# Altium PCB 2008_SablierElectronique_PCB.PcbDoc (part 2 of 2)
Units mil, origin at the board's own origin, x right, y up, seen from the top; angles counter-clockwise.
Board outline 5246.25 x 5915.54 mil, 2 copper layers (Top Layer, Bottom Layer), stack 62.441 mil thick; 184 components, 217 nets, 656 pads, 372 vias.
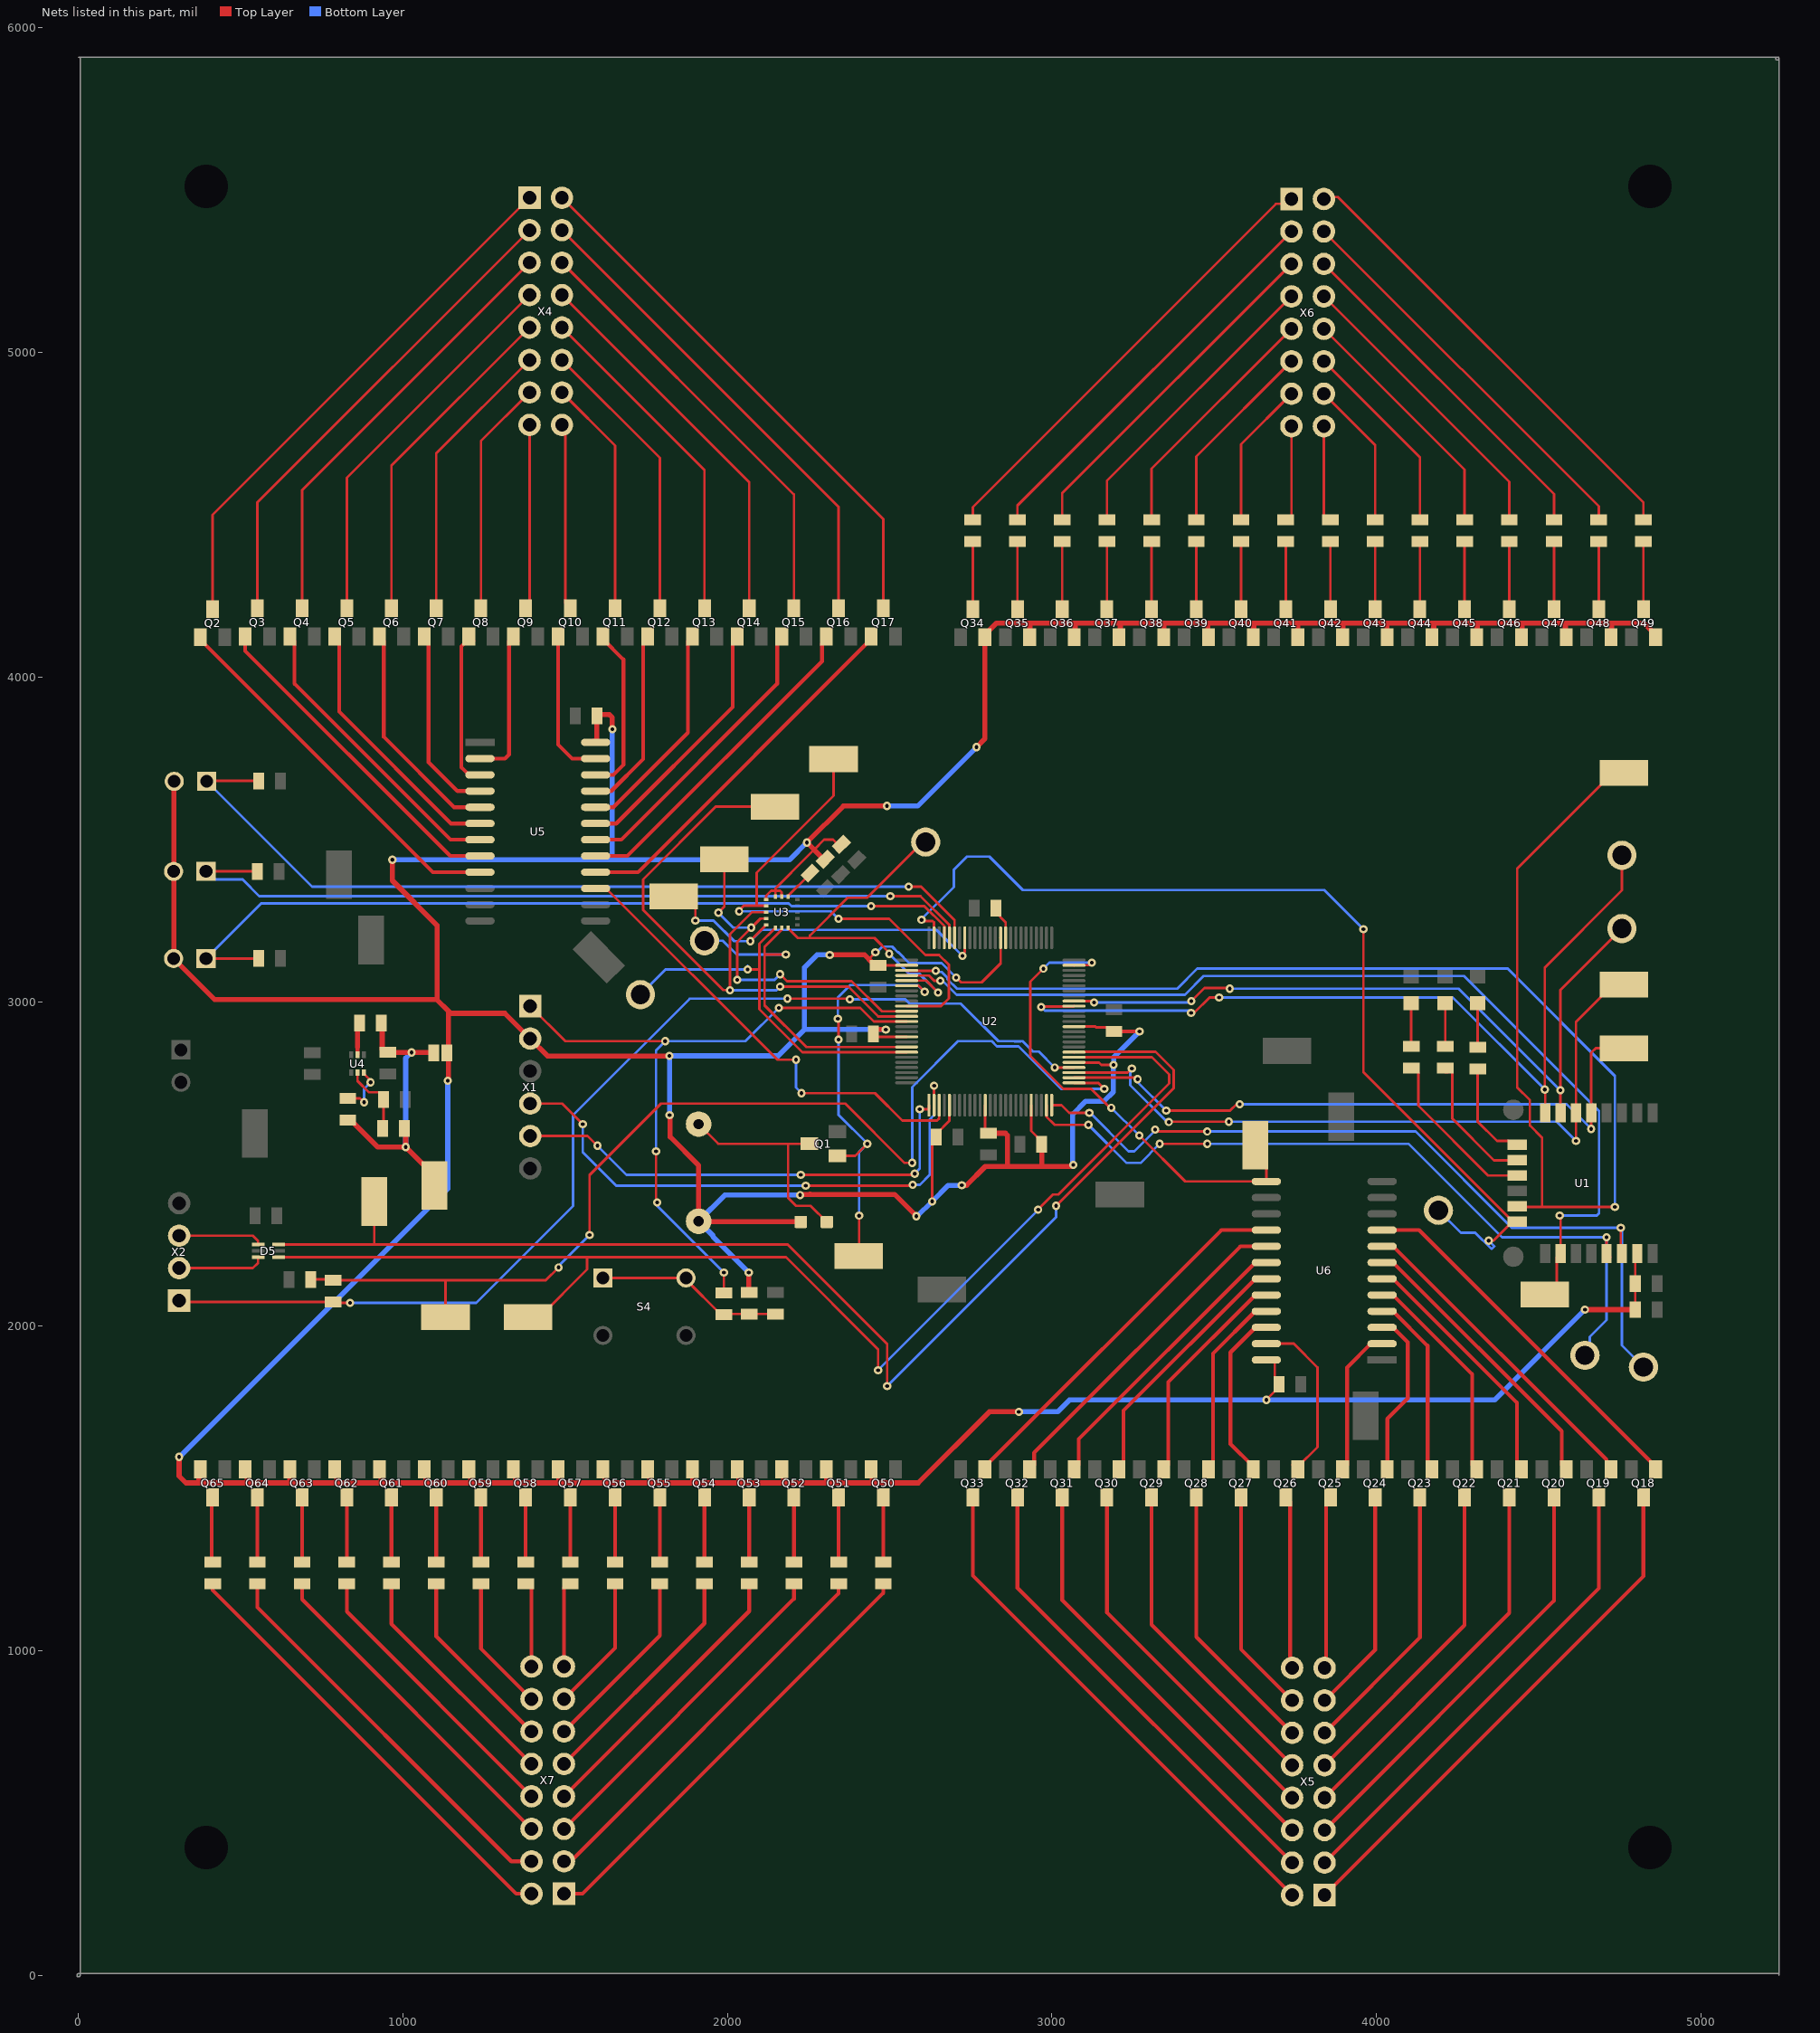
[diagram p2: the nets of this part, all layers, seen from the top]

## Via types
v1: diameter 25.59, hole 11.81, Top Layer to Bottom Layer, tented both sides, 237 vias
v2: diameter 25.59, hole 11.81, Top Layer to Bottom Layer, tented top, 134 vias
v3: diameter 25.59, hole 11.81, Top Layer to Bottom Layer, 1 vias

## Nets (pads, with @x,y where several pads share a name; then routed paths per layer and width w, separated by ;. In a path a pad name is that pad's centre, name@x,y a point inside that pad or via, vN(x,y) a via of type N, cw(c..) or ccw(c..) an arc to the next point about the centre after c; other vN are vias at no path point) (continued)
LB4: TP28.1 U2.74 U6.13 | length 1499.9
  Top Layer w7.87: v1(2973.46,3101.46) 2933.36,3061.36 2933.36,2842.14 2933.42,2842.08 2933.42,2832.99 3035.01,2731.4 3120.91,2731.4 3179.32,2673 v1(3183,2673) ; U2.74@3067.87,3112.05 3068.18,3112.35 3114.75,3112.35 3122.4,3120 v1(3123,3120) ; v1(3269,2587.45) 3410.45,2446 U6.13@3660.73,2446 3660.73,2501.96 3624.71,2537.99 TP28.1@3620.08,2537.99
  Bottom Layer w7.87: v1(2973.46,3101.46) 2992,3120 v1(3123,3120) ; v1(3183,2673) 3266,2590 3266.45,2590 v1(3269,2587.45)
MatriceON: U2.28 U5.15 | length 1449.6
  Top Layer w7.87: U5.15@1593.62,3348.82 1626.18,3348.82 2154,2821 v1(2211,2821) ; v1(2228,2718) 2454.49,2718 2539.18,2633.3 2646.14,2633.3 2652.52,2639.68 U2.28@2652.52,2680.94
  Bottom Layer w7.87: v1(2211,2821) 2211,2735 v1(2228,2718)
NetC1_1: C1.1 U2.85 | length 94.7
  Top Layer w7.87: C1.1@2824.05,3277.66 2857.24,3244.46 U2.85@2857.24,3196.69
NetC3_2: C3.2 U3.14 | length 99.7
  Top Layer w7.87: U3.14@2187.01,3323.88 2187.01,3325.85 2254.34,3393.18 C3.2@2254.34,3395.74
NetC14_2: C14.2 R9.2 R10.1 S4.1 S4.2 | length 576.8
  Top Layer w7.87: S4.1@1616.05,2148.58 S4.2@1866.32,2148.58 ; S4.2@1871.95,2148.58 1871.95,2143.72 1980.14,2035.53 1984.57,2035.53 1986.57,2037.54 C14.2@2148,2037.54
NetC16_2: C16.2 J1.2 L1.1 R11.1 R12.1 TP21.1 | length 970.1
  Top Layer w15.75: R11.1@830,2635.35 838.86,2635.35 922.25,2551.96 v1(1008.48,2551.96) ; L1.1@933.46,2934.23 935.71,2931.98 935.71,2852.32 944.57,2843.46 C16.2@953.43,2843.46 v1(1026.1,2843.46) 1088.81,2843.46 J1.2@1089.99,2842.28 ; R12.1@1003.46,2608.82 1012.32,2599.96 1008.48,2596.12 v1(1008.48,2551.96) ; TP21.1@1096.78,2433.69 1096.78,2463.66 v1(1008.48,2551.96)
  Bottom Layer w15.75: v1(1008.48,2551.96) 1008.48,2825.84 v1(1026.1,2843.46)
NetD1_2: D1.2 R1.2 | length 135.4
  Top Layer w7.87: R1.2@4312,2859.46 D1.2@4312,2994.84
NetD2_2: D2.2 R2.2 | length 132.7
  Top Layer w7.87: R2.2@4212,2862.12 D2.2@4212,2994.84
NetD3_2: D3.2 R3.2 | length 132.7
  Top Layer w7.87: R3.2@4107.18,2862.12 D3.2@4107.18,2994.84
NetD4_A: D4.A LS1.N Q1.3 | length 683
  Top Layer w7.87: LS1.N@1911,2622.61 1971.61,2562 2187.01,2562 ; Q1.3@2252.15,2562 2187.01,2562 ; D4.A@2306.16,2321.04 2305.76,2321.04 2255.81,2371 2211,2371 2187.01,2394.99 2187.01,2562
NetD5_1: D5.1 TP19.1 U2.56 | length 3918.7
  Top Layer w7.87: D5.1@616.69,2212.31 1567.48,2212.31 ; TP19.1@1385.24,2027.5 1420.08,2027.5 1567.48,2174.9 1567.48,2212.31 ; v1(2464,1864) 2464,1928.91 2180.6,2212.31 1567.48,2212.31 ; v1(2957.36,2359) 2957.36,2359.47 3003.4,2405.51 3019.53,2405.51 3361.43,2747.41 3361.43,2775.74 3308.51,2828.66 3067.95,2828.66 U2.56@3067.87,2828.58
  Bottom Layer w7.87: v1(2464,1864) 2957.36,2357.36 v1(2957.36,2359)
NetD5_3: D5.3 TP20.1 U2.57 | length 3936.1
  Top Layer w7.87: D5.3@616.69,2251.68 911.25,2251.68 ; TP20.1@911.25,2384 911.25,2251.68 ; v1(2492,1815.14) 2492,1945 2185.32,2251.68 911.25,2251.68 ; v1(3012.97,2371) 3013.11,2371 3375.21,2733.1 3375.21,2789.63 3319.32,2845.51 3069.66,2845.51 3068.18,2844.03 U2.57@3067.87,2844.33
  Bottom Layer w7.87: v1(2492,1815.14) 3012.97,2336.11 v1(3012.97,2371)
NetD5_4: D5.4 X2.3 | length 261
  Top Layer w7.87: X2.3@310,2278.82 537.23,2278.82 553.31,2262.74 D5.4@553.31,2251.68
NetD5_6: D5.6 X2.2 | length 267.4
  Top Layer w7.87: X2.2@310,2178.82 537.23,2178.82 553.31,2194.89 D5.6@553.31,2212.31
NetL1_2: L1.2 U4.2 | length 89.6
  Top Layer w11.81: U4.2@860,2836.49 860,2860
  Top Layer w15.75: 860,2860 L1.2@860,2926.1
NetQ1_1: Q1.1 TP9.1 U2.6 | length 1308.8
  Top Layer w7.87: Q1.1@2338.76,2524.6 2393.61,2524.6 v1(2431,2561.99) ; v1(2340,2947) 2342,2945 v1(2342,2883) ; TP9.1@2404.73,2216.38 2405.75,2217.4 v1(2405.75,2340.47) ; U2.6@2552.13,3049.05 2552.43,3048.75 2589.25,3048.75 v1(2608,3030)
  Bottom Layer w7.87: v1(2340,2947) 2340,3012.3 2378.85,3051.15 2585.85,3051.15 2607,3030 v1(2608,3030) ; v1(2342,2883) 2342,2650.99 v1(2431,2561.99) 2405.75,2536.75 v1(2405.75,2340.47)
NetQ2_1: Q2.1 U5.9 | length 1165.6
  Top Layer w11.81: Q2.1@375.98,4122.83 375.98,4114.96 1092.13,3398.82 U5.9@1237.09,3398.82
NetQ2_3: Q2.3 X4.1 | length 1672.1
  Top Layer w7.87: Q2.3@413.39,4209.45 413.39,4500.39 X4.1@1390,5477
NetQ3_1: Q3.1 U5.8 | length 1029.6
  Top Layer w11.81: Q3.1@513.78,4125.22 513.78,4080.56 1145.52,3448.82 U5.8@1237.09,3448.82
NetQ3_3: Q3.3 X4.2 | length 1512.6
  Top Layer w7.87: Q3.3@551.18,4211.83 551.18,4538.18 X4.2@1390,5377
NetQ4_1: Q4.1 U5.7 | length 930.1
  Top Layer w11.81: Q4.1@651.57,4117.35 Q4.1@651.57,4125.22 665.35,4111.44 665.35,3979.65 1146.18,3498.82 U5.7@1237.09,3498.82
NetQ4_3: Q4.3 X4.3 | length 1355.5
  Top Layer w7.87: Q4.3@688.98,4211.83 688.98,4575.98 X4.3@1390,5277
NetQ5_1: Q5.1 U5.6 | length 822.1
  Top Layer w11.81: Q5.1@789.37,4117.35 Q5.1@789.37,4125.22 793.31,4121.28 803.15,4111.44 803.15,3893.27 1147.6,3548.82 U5.6@1237.09,3548.82
NetQ5_3: Q5.3 X4.4 | length 1198.5
  Top Layer w7.87: Q5.3@826.77,4211.83 826.77,4613.77 X4.4@1390,5177
NetQ6_1: Q6.1 U5.5 | length 701.5
  Top Layer w11.81: Q6.1@927.17,4125.22 940.95,4111.44 940.95,3815.2 1157.33,3598.82 U5.5@1237.09,3598.82
NetQ6_3: Q6.3 X4.5 | length 1041.4
  Top Layer w7.87: Q6.3@964.57,4211.83 964.57,4651.57 X4.5@1390,5077
NetQ7_1: Q7.1 U5.4 | length 588.4
  Top Layer w11.81: Q7.1@1064.96,4125.22 1078.74,4111.44 1078.74,3737.68 1167.6,3648.82 U5.4@1237.09,3648.82
NetQ7_3: Q7.3 X4.6 | length 884.3
  Top Layer w7.87: Q7.3@1102.36,4211.83 1102.36,4689.36 X4.6@1390,4977
NetQ8_1: Q8.1 U5.3 | length 498.9
  Top Layer w11.81: Q8.1@1216.54,4111.44 1206.69,4121.28 Q8.1@1202.76,4125.22 1202.76,4117.35 1180.04,4094.63 1180.04,3721.79 1203.01,3698.82 U5.3@1237.09,3698.82
NetQ8_3: Q8.3 X4.7 | length 727.2
  Top Layer w7.87: Q8.3@1240.16,4211.83 1240.16,4727.16 X4.7@1390,4877
NetQ9_1: Q9.1 U5.2 | length 484
  Top Layer w11.81: U5.2@1237.09,3748.82 1314.31,3748.82 1326.77,3761.28 1326.77,4111.44 Q9.1@1340.55,4125.22 Q9.1@1354.33,4111.44
NetQ9_3: Q9.3 X4.8 | length 570.2
  Top Layer w7.87: Q9.3@1377.95,4211.83 1390,4223.88 X4.8@1390,4777
NetQ10_1: Q10.1 U5.23 | length 477.9
  Top Layer w11.81: U5.23@1593.62,3748.82 1521.39,3748.82 1478,3792.2 1478,4117 Q10.1@1478.35,4117.35 ; Q10.1@1478.35,4117.35 1482.28,4121.28 Q10.1@1478.35,4125.22 Q10.1@1478.35,4117.35
NetQ10_3: Q10.3 X4.9 | length 575.8
  Top Layer w7.87: X4.9@1490,4777 1500,4767 1500,4227.58 Q10.3@1515.75,4211.83
NetQ11_1: Q11.1 U5.22 | length 520
  Top Layer w11.81: U5.22@1593.62,3698.82 1648.39,3698.82 1679.13,3729.56 1679.13,4054.35 1616.14,4117.35 Q11.1@1616.14,4125.22
NetQ11_3: Q11.3 X4.10 | length 732.9
  Top Layer w7.87: X4.10@1490,4877 1653.54,4713.46 Q11.3@1653.54,4211.83
NetQ12_1: Q12.1 U5.21 | length 570.9
  Top Layer w11.81: U5.21@1593.62,3648.82 1641.63,3648.82 1740.16,3747.34 1740.16,4111.44 Q12.1@1753.94,4125.22
NetQ12_3: Q12.3 X4.11 | length 890
  Top Layer w7.87: X4.11@1490,4977 1791.34,4675.66 Q12.3@1791.34,4211.83
NetQ13_1: Q13.1 U5.20 | length 681.6
  Top Layer w11.81: U5.20@1593.62,3598.82 1647.82,3598.82 1877.95,3828.95 1877.95,4111.44 Q13.1@1891.73,4125.22
NetQ13_3: Q13.3 X4.12 | length 1047.1
  Top Layer w7.87: X4.12@1490,5077 1929.13,4637.87 Q13.3@1929.13,4211.83
NetQ14_1: Q14.1 U5.19 | length 794.1
  Top Layer w11.81: U5.19@1593.62,3548.82 1656.99,3548.82 2015.75,3907.58 2015.75,4111.44 Q14.1@2029.53,4125.22
NetQ14_3: Q14.3 X4.13 | length 1204.1
  Top Layer w7.87: X4.13@1490,5177 2066.93,4600.07 Q14.3@2066.93,4211.83
NetQ15_1: Q15.1 U5.18 | length 910.4
  Top Layer w11.81: U5.18@1593.62,3498.82 1672.76,3498.82 2153.54,3979.6 2153.54,4111.44 Q15.1@2167.32,4125.22
NetQ15_3: Q15.3 X4.14 | length 1361.2
  Top Layer w7.87: X4.14@1490,5277 2204.72,4562.28 Q15.3@2204.72,4211.83
NetQ16_1: Q16.1 U5.17 | length 1028.5
  Top Layer w11.81: U5.17@1593.62,3448.82 1691.63,3448.82 2291.34,4048.52 2291.34,4103.57 2305.12,4117.35 Q16.1@2305.12,4125.22
NetQ16_3: Q16.3 X4.15 | length 1518.3
  Top Layer w7.87: X4.15@1490,5377 2342.52,4524.48 Q16.3@2342.52,4211.83
NetQ17_1: Q17.1 U5.16 | length 1154.8
  Top Layer w11.81: U5.16@1593.62,3398.82 1724.39,3398.82 2442.91,4117.35 Q17.1@2442.91,4125.22
NetQ17_3: Q17.3 X4.16 | length 1675.4
  Top Layer w7.87: X4.16@1490,5477 2480.31,4486.69 Q17.3@2480.31,4211.83
NetQ18_1: Q18.1 U6.9 | length 1152.8
  Top Layer w11.81: U6.9@4017.27,2296 4131.17,2296 4860.24,1566.93 Q18.1@4860.24,1559.06
NetQ18_3: Q18.3 X5.1 | length 1632.4
  Top Layer w11.81: X5.1@3840.16,247.12 4822.84,1229.8 Q18.3@4822.84,1472.44
NetQ19_1: Q19.1 U6.8 | length 999
  Top Layer w11.81: U6.8@4017.27,2246 4051.34,2246 4708.66,1588.68 4708.66,1572.84 Q19.1@4722.44,1559.06
NetQ19_3: Q19.3 X5.2 | length 1475.3
  Top Layer w11.81: X5.2@3840.16,347.12 4685.04,1192.01 Q19.3@4685.04,1472.44
NetQ20_1: Q20.1 U6.7 | length 891.9
  Top Layer w11.81: U6.7@4017.27,2196 4051.34,2196 4570.87,1676.48 4570.87,1572.84 Q20.1@4584.65,1559.06
NetQ20_3: Q20.3 X5.3 | length 1318.2
  Top Layer w11.81: X5.3@3840.16,447.12 4547.24,1154.21 Q20.3@4547.24,1472.44
NetQ21_1: Q21.1 U6.6 | length 784.8
  Top Layer w11.81: U6.6@4017.27,2146 4051.34,2146 4433.07,1764.27 4433.07,1572.84 Q21.1@4446.85,1559.06
NetQ21_3: Q21.3 X5.4 | length 1161.1
  Top Layer w11.81: X5.4@3840.16,547.12 4409.45,1116.42 Q21.3@4409.45,1472.44
NetQ22_1: Q22.1 U6.5 | length 677.8
  Top Layer w11.81: U6.5@4017.27,2096 4051.34,2096 4295.28,1852.07 4295.28,1572.84 Q22.1@4309.06,1559.06
NetQ22_3: Q22.3 X5.5 | length 1004.1
  Top Layer w11.81: X5.5@3840.16,647.12 4271.65,1078.62 Q22.3@4271.65,1472.44
NetQ23_1: Q23.1 U6.4 | length 570.7
  Top Layer w11.81: U6.4@4017.27,2046 4051.34,2046 4157.48,1939.86 4157.48,1572.84 Q23.1@4171.26,1559.06
NetQ23_3: Q23.3 X5.6 | length 847
  Top Layer w11.81: X5.6@3840.16,747.12 4133.86,1040.82 Q23.3@4133.86,1472.44
NetQ24_1: Q24.1 U6.3 | length 515.8
  Top Layer w11.81: U6.3@4017.27,1996 4051.34,1996 4096.46,1950.88 4096.46,1777.46 4033.46,1714.46 Q24.1@4033.46,1559.06
NetQ24_3: Q24.3 X5.7 | length 689.9
  Top Layer w11.81: X5.7@3840.16,847.12 3996.06,1003.03 Q24.3@3996.06,1472.44
NetQ25_1: Q25.1 U6.2 | length 457.3
  Top Layer w11.81: Q25.1@3895.67,1559.06 3909.45,1572.84 3909.45,1872.26 3983.19,1946 U6.2@4017.27,1946
NetQ25_3: Q25.3 X5.8 | length 532.8
  Top Layer w11.81: X5.8@3840.16,947.12 3844.49,951.45 3844.49,1458.66 Q25.3@3858.27,1472.44
NetQ26_1: Q26.1 U6.23 | length 545.8
  Top Layer w7.87: U6.23@3660.73,1946 3745,1946 3818,1873 3818,1627.06 3757.87,1566.93 Q26.1@3757.87,1559.06
  Top Layer w11.81: Q26.1@3744.09,1572.84 Q26.1@3757.87,1559.06
NetQ26_3: Q26.3 X5.9 | length 533.5
  Top Layer w11.81: Q26.3@3720.47,1472.44 3734.25,1458.66 3734.25,953.03 X5.9@3740.16,947.12
NetQ27_1: Q27.1 U6.22 | length 531.8
  Top Layer w11.81: Q27.1@3620.08,1559.06 3620.08,1566.93 3550,1637.01 3550,1919.34 3626.66,1996 U6.22@3660.73,1996
NetQ27_3: Q27.3 X5.10 | length 690.5
  Top Layer w11.81: Q27.3@3582.68,1472.44 3582.68,1004.6 X5.10@3740.16,847.12
NetQ28_1: Q28.1 U6.21 | length 580.8
  Top Layer w11.81: Q28.1@3482.28,1559.06 3496.06,1572.84 3496.06,1915.41 3626.66,2046 U6.21@3660.73,2046
NetQ28_3: Q28.3 X5.11 | length 847.6
  Top Layer w11.81: Q28.3@3444.88,1472.44 3444.88,1042.4 X5.11@3740.16,747.12
NetQ29_1: Q29.1 U6.20 | length 687.9
  Top Layer w11.81: Q29.1@3344.49,1559.06 3358.27,1572.84 3358.27,1827.61 3626.66,2096 U6.20@3660.73,2096
NetQ29_3: Q29.3 X5.12 | length 1004.7
  Top Layer w11.81: Q29.3@3307.09,1472.44 3307.09,1080.19 X5.12@3740.16,647.12
NetQ30_1: Q30.1 U6.19 | length 795
  Top Layer w11.81: Q30.1@3206.69,1559.06 3220.47,1572.84 3220.47,1739.82 3626.66,2146 U6.19@3660.73,2146
NetQ30_3: Q30.3 X5.13 | length 1161.8
  Top Layer w11.81: Q30.3@3169.29,1472.44 3169.29,1117.99 X5.13@3740.16,547.12
NetQ31_1: Q31.1 U6.18 | length 902
  Top Layer w11.81: Q31.1@3068.9,1559.06 3082.68,1572.84 3082.68,1652.02 3626.66,2196 U6.18@3660.73,2196
NetQ31_3: Q31.3 X5.14 | length 1318.9
  Top Layer w11.81: Q31.3@3031.5,1472.44 3031.5,1155.78 X5.14@3740.16,447.12
NetQ32_1: Q32.1 U6.17 | length 1035.9
  Top Layer w11.81: Q32.1@2931.1,1559.06 2944.88,1572.84 2944.88,1609.88 3581,2246 U6.17@3660.73,2246
NetQ32_3: Q32.3 X5.15 | length 1475.9
  Top Layer w11.81: Q32.3@2893.7,1472.44 2893.7,1193.58 X5.15@3740.16,347.12
NetQ33_1: Q33.1 U6.16 | length 1177.3
  Top Layer w11.81: Q33.1@2793.31,1559.06 2793.31,1566.93 3522.38,2296 U6.16@3660.73,2296
NetQ33_3: Q33.3 X5.16 | length 1633
  Top Layer w11.81: Q33.3@2755.91,1472.44 2755.91,1231.37 X5.16@3740.16,247.12
NetQ34_3: Q34.3 R14.2 | length 208.7
  Top Layer w7.87: Q34.3@2755.9,4209.45 R14.2@2755.91,4418.11
NetQ35_3: Q35.3 R15.2 | length 208.7
  Top Layer w7.87: Q35.3@2893.7,4209.45 R15.2@2893.7,4418.11
NetQ36_3: Q36.3 R16.2 | length 208.7
  Top Layer w7.87: Q36.3@3031.5,4209.45 R16.2@3031.5,4418.11
NetQ37_3: Q37.3 R17.2 | length 208.7
  Top Layer w7.87: Q37.3@3169.29,4209.45 R17.2@3169.29,4418.11
NetQ38_3: Q38.3 R18.2 | length 208.7
  Top Layer w7.87: Q38.3@3307.09,4209.45 R18.2@3307.09,4418.11
NetQ39_3: Q39.3 R19.2 | length 208.7
  Top Layer w7.87: Q39.3@3444.88,4209.45 R19.2@3444.88,4418.11
NetQ40_3: Q40.3 R20.2 | length 208.7
  Top Layer w7.87: Q40.3@3582.68,4209.45 R20.2@3582.68,4418.11
NetQ41_3: Q41.3 R21.2 | length 208.7
  Top Layer w7.87: Q41.3@3720.47,4209.45 R21.2@3720.47,4418.11
NetQ42_3: Q42.3 R22.2 | length 208.7
  Top Layer w7.87: Q42.3@3858.27,4209.45 R22.2@3858.27,4418.11
NetQ43_3: Q43.3 R23.2 | length 208.7
  Top Layer w7.87: Q43.3@3996.06,4209.45 R23.2@3996.06,4418.11
NetQ44_3: Q44.3 R24.2 | length 208.7
  Top Layer w7.87: Q44.3@4133.86,4209.45 R24.2@4133.86,4418.11
NetQ45_3: Q45.3 R25.2 | length 208.7
  Top Layer w7.87: Q45.3@4271.65,4209.45 R25.2@4271.65,4418.11
NetQ46_3: Q46.3 R26.2 | length 208.7
  Top Layer w7.87: Q46.3@4409.45,4209.45 R26.2@4409.45,4418.11
NetQ47_3: Q47.3 R27.2 | length 208.7
  Top Layer w7.87: Q47.3@4547.24,4209.45 R27.2@4547.24,4418.11
NetQ48_3: Q48.3 R28.2 | length 208.7
  Top Layer w7.87: Q48.3@4685.04,4209.45 R28.2@4685.04,4418.11
NetQ49_3: Q49.3 R29.2 | length 208.7
  Top Layer w7.87: Q49.3@4822.83,4209.45 R29.2@4822.84,4418.11
NetQ50_3: Q50.3 R30.2 | length 198.8
  Top Layer w11.81: R30.2@2480.32,1273.62 Q50.3@2480.32,1472.44
NetQ51_3: Q51.3 R31.2 | length 198.8
  Top Layer w11.81: R31.2@2342.52,1273.62 Q51.3@2342.52,1472.44
NetQ52_3: Q52.3 R32.2 | length 198.8
  Top Layer w11.81: R32.2@2204.72,1273.62 Q52.3@2204.72,1472.44
NetQ53_3: Q53.3 R33.2 | length 198.8
  Top Layer w11.81: R33.2@2066.93,1273.62 Q53.3@2066.93,1472.44
NetQ54_3: Q54.3 R34.2 | length 198.8
  Top Layer w11.81: R34.2@1929.13,1273.62 Q54.3@1929.13,1472.44
NetQ55_3: Q55.3 R35.2 | length 198.8
  Top Layer w11.81: R35.2@1791.34,1273.62 Q55.3@1791.34,1472.44
NetQ56_3: Q56.3 R36.2 | length 198.8
  Top Layer w11.81: R36.2@1653.54,1273.62 Q56.3@1653.54,1472.44
NetQ57_3: Q57.3 R37.2 | length 198.8
  Top Layer w11.81: R37.2@1515.75,1273.62 Q57.3@1515.75,1472.44
NetQ58_3: Q58.3 R38.2 | length 198.8
  Top Layer w11.81: R38.2@1377.95,1273.62 Q58.3@1377.95,1472.44
NetQ59_3: Q59.3 R39.2 | length 198.8
  Top Layer w11.81: R39.2@1240.16,1273.62 Q59.3@1240.16,1472.44
NetQ60_3: Q60.3 R40.2 | length 198.8
  Top Layer w11.81: R40.2@1102.36,1273.62 Q60.3@1102.36,1472.44
NetQ61_3: Q61.3 R41.2 | length 198.8
  Top Layer w11.81: R41.2@964.57,1273.62 Q61.3@964.57,1472.44
NetQ62_3: Q62.3 R42.2 | length 198.8
  Top Layer w11.81: R42.2@826.77,1273.62 Q62.3@826.77,1472.44
NetQ63_3: Q63.3 R43.2 | length 198.8
  Top Layer w11.81: R43.2@688.98,1273.62 Q63.3@688.98,1472.44
NetQ64_3: Q64.3 R44.2 | length 198.8
  Top Layer w11.81: R44.2@551.18,1273.62 Q64.3@551.18,1472.44
NetQ65_3: Q65.3 R45.2 | length 201.5
  Top Layer w11.81: R45.2@413.39,1273.62 410.17,1276.84 410.17,1460 413.39,1463.22 Q65.3@413.39,1472.44
NetR1_1: R1.1 U1.10 | length 313.7
  Top Layer w7.87: R1.1@4312,2792.54 4312,2630.24 4371.85,2570.39 4408.09,2570.39 4419.9,2558.58 U1.10@4433.68,2558.58
NetR2_1: R2.1 U1.11 | length 431.7
  Top Layer w7.87: R2.1@4212,2782.72 R2.1@4220.86,2782.72 ; R2.1@4212,2795.19 4220.86,2795.19 4233.65,2782.4 4233.65,2639.73 4362.06,2511.33 U1.11@4433.68,2511.33
NetR3_1: R3.1 U1.12 | length 524.1
  Top Layer w7.87: R3.1@4107.18,2795.19 4116.04,2795.19 4128.84,2782.4 4128.84,2679.16 4343.91,2464.09 U1.12@4433.68,2464.09
NetR4_1: R4.1 R5.1 TP18.1 U2.51 | length 3428.6
  Top Layer w7.87: R5.1@715.46,2144 782.46,2144 R4.1@785,2141.46 1127.95,2141.46 ; TP18.1@1131,2027.5 1131,2138.42 1127.95,2141.46 ; v1(1479.22,2180.93) 1439.75,2141.46 1127.95,2141.46 ; v1(1574.8,2281) 1574.8,2465.62 1795.18,2686 2362.74,2686 2545.74,2503 v1(2569,2503) ; U2.51@3067.57,2750.14 U2.51@3067.87,2749.84 3068.18,2749.54 3142.88,2749.54 3161.02,2731.4 v1(3161.19,2731.4)
  Bottom Layer w7.87: v1(1479.22,2180.93) 1479.22,2185.41 v1(1574.8,2281) ; v1(2569,2503) 2569,2737 2710,2878 2814.35,2878 2830.34,2862.01 2897.01,2862.01 3027.62,2731.4 v1(3161.19,2731.4)
NetR6_1: R6.1 S2.1 U2.96 | length 2543
  Top Layer w7.87: S2.1@400,3398.82 402.5,3401.32 R6.1@551.18,3401.32 ; v1(2502,3325) 2595.01,3325 2683.72,3236.29 2683.72,3196.99 U2.96@2684.02,3196.69
  Bottom Layer w7.87: S2.1@400,3398.82 422.64,3376.18 505.82,3376.18 557,3325 v1(2502,3325)
NetR7_1: R7.1 S3.1 U2.97 | length 2572.7
  Top Layer w7.87: S3.1@393,3132.82 R7.1@555.12,3132.82 ; v1(2442.78,3294.13) 2606.39,3294.13 2667.97,3232.55 2667.97,3196.99 U2.97@2668.27,3196.69
  Bottom Layer w7.87: S3.1@393,3132.82 563.12,3302.94 2188.23,3302.94 2197.04,3294.13 v1(2442.78,3294.13)
NetR8_1: R8.1 S1.1 U2.95 | length 2696.8
  Top Layer w7.87: S1.1@395,3678.82 396.18,3680 R8.1@555.12,3680 ; v1(2558,3354) 2596.66,3354 2699.76,3250.89 U2.95@2699.76,3196.69
  Bottom Layer w7.87: S1.1@395,3678.82 719.82,3354 v1(2558,3354)
NetR10_2: R10.2 U2.13 X1.1 | length 2138.7
  Top Layer w7.87: X1.1@1392,2986 1500,2878 v1(1808,2878) ; v1(1780,2539) 1780,2384 v1(1783,2381) ; R10.2@1989,2102.46 v1(1989,2165) ; v1(2158,2981) 2409,2981 2451.18,2938.82 U2.13@2552.13,2938.82
  Bottom Layer w7.87: v1(1780,2539) 1780,2850 v1(1808,2878) 2055,2878 v1(2158,2981) ; v1(1783,2381) 1783,2371 v1(1989,2165)
NetR11_2: R11.2 U4.6 | length 163
  Top Layer w7.87: R11.2@830,2702.28 867.4,2702.28 879.68,2690 v1(880,2690) ; U4.6@879.68,2781.26 879.68,2777.26 894.96,2761.98 894.96,2761.33 900,2756.29 v1(900,2751.49)
  Bottom Layer w7.87: v1(880,2690) 880,2731.49 v1(900,2751.49)
NetR12_2: R12.2 R13.1 U4.5 | length 225.9
  Top Layer w7.87: U4.5@860,2781.26 860,2755.43 894.96,2720.47 927.2,2720.47 940,2707.68 R13.1@940,2698.82 940,2612.28 R12.2@936.54,2608.82
NetTP1_1: TP1.1 U2.10 U3.2 | length 1616.4
  Top Layer w7.87: v1(2036,3278) 2036,3281 2050.34,3295.34 2089.72,3295.34 ; U3.2@2119.09,3295.34 2089.72,3295.34 ; TP1.1@2338.17,3735.96 TP1.1@2326.78,3747.34 2326.78,3634.77 2089.72,3397.71 2089.72,3295.34 ; v1(2342.52,3255.48) 2498.63,3255.48 2610.22,3143.89 2652.18,3143.89 2682.36,3113.7 2682.36,3010.36 2658.06,2986.06 U2.10@2552.13,2986.06
  Bottom Layer w7.87: v1(2036,3278) 2319.04,3278 2341.57,3255.48 v1(2342.52,3255.48)
NetTP2_1: TP2.1 U2.12 U3.3 | length 1861.5
  Top Layer w7.87: v1(2008.07,3035.19) v1@2007.46,3035.8 ; U3.3@2119.09,3275.66 2075.66,3275.66 2007.46,3207.46 v1@2007.46,3035.8 ; TP2.1@2146.42,3600.48 1963.92,3600.48 1740.16,3376.72 1740.16,3282.54 1986.9,3035.8 v1@2007.46,3035.8 ; v1(2162.06,3046.09) 2372.91,3046.09 2464.43,2954.57 U2.12@2552.13,2954.57
  Bottom Layer w7.87: v1(2008.07,3035.19) 2151.15,3035.19 v1(2162.06,3046.09)
NetTP3_1: TP3.1 U2.11 U3.4 | length 1104.5
  Top Layer w7.87: v1(1971.93,3274) 1990.45,3292.52 TP3.1@1990.45,3438.66 ; v1(2030.1,3067.3) 2030.1,3184.35 2101.72,3255.97 U3.4@2119.09,3255.97 ; v1(2162.06,3084.36) 2183.26,3063.16 2382.84,3063.16 2475.69,2970.31 U2.11@2552.13,2970.31
  Bottom Layer w7.87: v1(1971.93,3274) 2017.93,3228 v1(2073,3228) ; v1(2030.1,3067.3) 2144.99,3067.3 v1(2162.06,3084.36)
NetTP4_1: TP4.1 U2.93 U3.5 | length 1072.7
  Top Layer w7.87: v1@1900,3250 v1(1901,3250) 1901,3294 TP4.1@1902,3295 ; v1(2070.41,3186.03) 2070.41,3187.6 U3.5@2119.09,3236.29 ; v1(2724,3141) 2724,3145.79 2730.96,3152.75 2730.96,3196.39 U2.93@2731.26,3196.69
  Bottom Layer w7.87: v1(1901,3250) 1957,3250 2020.97,3186.03 v1(2070.41,3186.03) 2105.38,3221 2644,3221 v1(2724,3141)
NetTP5_1: TP5.1 U1.6 U2.53 | length 2244.8
  Top Layer w7.87: U2.53@3067.87,2781.34 3233.34,2781.34 v1(3246,2794) ; v1(3360.19,2628.97) 3361.43,2630.2 v1(3545,2630.2) ; v1(4615,2571) 4615,2656.78 U1.6@4614.78,2657 4614.78,2937.13 4730.52,3052.87 TP5.1@4763.04,3052.87
  Bottom Layer w7.87: v1(3246,2794) 3241.36,2789.36 3241.36,2742.62 3355.02,2628.97 v1(3360.19,2628.97) ; v1(3545,2630.2) 4555.8,2630.2 v1(4615,2571)
NetTP6_1: TP6.1 U1.5 U2.52 | length 2038.1
  Top Layer w7.87: U2.52@3067.87,2765.59 3068.08,2765.8 3259.2,2765.8 v1(3264,2761) ; v1(3352,2664) 3548.66,2664 3571.36,2686.7 3578.69,2679.37 v1(3578.69,2683.84) v1@3578.98,2683.84 ; v1(4662,2608) 4662,2842.18 4676.13,2856.31 TP6.1@4763.04,2856.31 TP6.1@4769.8,2856.31
  Bottom Layer w7.87: v1(3264,2761) 3264,2752 v1(3352,2664) ; v1(3578.69,2683.84) 4586.16,2683.84 v1(4662,2608)
NetTP7_1: TP7.1 U1.14 U2.3 | length 4605.1
  Top Layer w7.87: U2.3@2552.13,3096.3 2553.31,3095.12 2641.88,3095.12 v1(2642,3095) ; U1.14@4433.68,2369.6 4435.08,2371 4439.08,2367 4510.26,2367 ; v1(4735,2367) 4510.26,2367 ; TP7.1@4763.04,3704.7 4728.19,3704.7 4433.68,3410.19 4433.68,2735.32 4473,2696 4473,2618 4510.26,2580.74 4510.26,2367
  Bottom Layer w7.87: v1(2642,3095) 2645.39,3091.61 2660.04,3091.61 2678.27,3073.38 2678.27,3068.72 2706.99,3040 3386.19,3040 3447.65,3101.46 4404.54,3101.46 4735,2771 v1(4735,2367)
NetTP8_1: TP8.1 U1.18 U2.4 | length 3059
  Top Layer w7.87: U2.4@2552.13,3080.55 2552.43,3080.25 2620.75,3080.25 2637,3064 v1(2655.63,3064) ; TP8.1@4519,2097.35 4519.7,2097.35 4555.72,2133.38 4555.72,2212.12 U1.18@4567.54,2223.93 4567.54,2338.46 v1(4565,2341)
  Bottom Layer w7.87: v1(2655.63,3064) 2663.26,3064 2706.26,3021 3409.5,3021 3467.5,3079 4270,3079 4686,2663 4686,2348 4679,2341 v1(4565,2341)
NetTP10_1: TP10.1 U1.7 U2.67 | length 2297.1
  Top Layer w7.87: U2.67@3067.87,3001.81 3068.18,3001.51 3125.49,3001.51 v1(3130,2997) ; v1(3429.81,3001.81) 3470,3042 3546,3042 v1(3548,3040) ; U1.7@4567.54,2657 4567,2657.54 v1(4567,2727) 4567,3035.64 TP10.1@4756.51,3225.15
  Bottom Layer w7.87: v1(3130,2997) 3425,2997 v1(3429.81,3001.81) ; v1(3548,3040) 4253,3040 4564,2729 4565,2729 v1(4567,2727)
NetTP11_1: TP11.1 U1.8 U2.66 | length 2693.2
  Top Layer w7.87: v1(2966.41,2983.41) 2967.88,2984.88 3066.69,2984.88 U2.66@3067.87,2986.06 ; v1(3429,2965) 3438,2965 3486,3013 v1(3515,3013) ; U1.8@4520.29,2657 4520.29,2727.71 v1(4519,2729) 4519,3105.35 4756.51,3342.86 TP11.1@4756.51,3451
  Bottom Layer w7.87: v1(2966.41,2983.41) 2977.82,2972 3422,2972 v1(3429,2965) ; v1(3515,3013) 4235,3013 v1(4519,2729)
NetTP12_1: TP12.1 U1.15 U2.99 | length 3105.4
  Top Layer w7.87: v1(2598,3252) 2601.39,3248.61 2632.42,3248.61 2636.47,3244.56 2636.47,3196.99 U2.99@2636.77,3196.69 ; v1(3960,3223) 3960,2782.25 U1.15@4419.9,2322.36 ; v1(4346,2263.4) 4360.94,2263.4 U1.15@4419.9,2322.36 ; U1.15@4426.79,2322.36 U1.15@4419.9,2322.36
  Bottom Layer w7.87: v1(2598,3252) 2596,3252 2697.26,3353.26 2697.26,3406.26 2738,3447 2807,3447 2910.36,3343.64 3839.36,3343.64 v1(3960,3223) ; TP12.1@4191,2356.96 4259.96,2288 4304,2288 4353.21,2238.79 4356.19,2238.79 4363.4,2246 v1(4346,2263.4)
NetTP13_1: TP13.1 U1.22 U2.50 | length 2520.6
  Top Layer w7.87: U2.50@2998.98,2680.94 3029.06,2680.94 3053,2657 v1(3114.99,2657) ; v1(3318,2606) 3324.33,2599.67 v1(3478.67,2599.67) ; v1(4753,2303) 4753,2227.44 U1.22@4756.51,2223.93
  Bottom Layer w7.87: v1(3114.99,2657) 3117.98,2657 3236.04,2538.94 3253.96,2538.94 3318,2602.98 v1(3318,2606) ; v1(3478.67,2599.67) 4120.33,2599.67 4417,2303 v1(4753,2303) 4756.39,2299.61 4756.39,1940.45 TP13.1@4822.84,1874.01 ; TP13.1@4826.23,1884.1 TP13.1@4836.32,1874.01
NetTP14_1: TP14.1 U1.21 U2.49 | length 2422.3
  Top Layer w7.87: U2.49@2983.23,2680.94 2983.53,2680.64 2983.53,2645.08 3008.26,2620.35 v1(3112.38,2620.35) ; v1(3332,2561.99) v1(3478.68,2562) ; v1(4709.27,2274) U1.21@4709.27,2223.93 U1.21@4721,2212.2
  Bottom Layer w7.87: v1(3112.38,2620.35) 3229.73,2503 3273.01,2503 v1(3332,2561.99) ; v1(3478.68,2562) 4099,2562 4387,2274 v1(4709.27,2274) 4709.27,2019.27 4657.12,1967.12 4657.12,1924.87 TP14.1@4642.56,1910.31
NetTP15_1: TP15.1 U2.5 U3.8 | length 1111.3
  Top Layer w7.87: U3.8@2187.01,3227.43 2187.01,3225.46 2216.47,3196 2253.94,3196 ; v1(2498,3147) 2498,3151 2453,3196 2253.94,3196 ; U2.5@2552.13,3064.8 2612.2,3064.8 v1(2649,3028) ; TP15.1@2584.91,3474.69 2430.35,3320.13 2370.02,3320.13 2253.94,3204.06 2253.94,3196
  Bottom Layer w7.87: v1(2498,3147) 2559.19,3085.8 2591.19,3085.8 v1(2649,3028)
NetTP16_1: TP16.1 U2.18 U3.7 | length 1085.4
  Top Layer w7.87: U3.7@2167.32,3227.43 2167.32,3221.38 2114.54,3168.6 2114.54,3146.08 ; v1(2179.67,3145.16) 2115.46,3145.16 2114.54,3146.08 ; U2.18@2552.13,2860.08 2242.92,2860.08 2114.54,2988.46 2114.54,3146.08
  Bottom Layer w7.87: TP16.1@1929,3187.6 1985.81,3187.6 2028.26,3145.16 v1(2179.67,3145.16)
NetTP17_1: TP17.1 U2.19 U3.6 | length 1189.6
  Top Layer w7.87: v1(2062,3099) 2098.43,3099 ; U3.6@2147.64,3227.43 2098.43,3178.22 2098.43,3099 ; U2.19@2552.13,2844.33 2230.67,2844.33 2098.43,2976.57 2098.43,3099
  Bottom Layer w7.87: TP17.1@1731.61,3021.7 1808.91,3099 v1(2062,3099) 2062,3109.87 v1@2061.87,3110
NetU2_26: U2.26 X1.5 | length 1483.4
  Top Layer w7.87: X1.5@1392,2586 1569,2586 v1(1599,2556) ; v1(2225.84,2466) 2573,2466 v1(2577,2470) ; v1@2592.61,2666.4 v1(2592.61,2668.05) 2620.3,2668.05 2621.02,2668.78 U2.26@2621.02,2680.94
  Bottom Layer w7.87: v1(1599,2556) 1689,2466 v1(2225.84,2466) ; v1(2577,2470) 2592.61,2485.61 v1(2592.61,2668.05)
NetU2_27: U2.27 X1.4 | length 1740.9
  Top Layer w7.87: X1.4@1392,2686 1490.61,2686 v1(1554,2622.61) ; v1(2241,2432.72) 2567.84,2432.72 v1(2571,2435.87) ; U2.27@2636.77,2680.94 v1(2636.77,2740.86)
  Bottom Layer w7.87: v1(1554,2622.61) 1554,2536 1657.28,2432.72 v1(2241,2432.72) ; v1(2571,2435.87) 2592.87,2435.87 2623,2466 2623,2636.37 2636.77,2650.14 v1(2636.77,2740.86)
OutBC1: R30.1 X7.1 | length 1396.9
  Top Layer w11.81: X7.1@1496.06,251.18 1553.54,251.18 2480.32,1177.95 R30.1@2480.32,1206.69
OutBC2: R31.1 X7.2 | length 1218.5
  Top Layer w11.81: X7.2@1496.06,351.18 1517.18,351.18 2342.52,1176.52 R31.1@2342.52,1206.69
OutBC3: R32.1 X7.3 | length 1049.1
  Top Layer w11.81: X7.3@1496.06,451.18 2204.72,1159.84 R32.1@2204.72,1206.69
OutBC4: R33.1 X7.4 | length 892
  Top Layer w11.81: X7.4@1496.06,551.18 2066.93,1122.05 R33.1@2066.93,1206.69
OutBC5: R34.1 X7.5 | length 734.9
  Top Layer w11.81: X7.5@1496.06,651.18 1929.13,1084.25 R34.1@1929.13,1206.69
OutBC6: R35.1 X7.6 | length 577.8
  Top Layer w11.81: X7.6@1496.06,751.18 1791.34,1046.46 R35.1@1791.34,1206.69
OutBC7: R36.1 X7.7 | length 420.7
  Top Layer w11.81: X7.7@1496.06,851.18 1653.54,1008.66 R36.1@1653.54,1206.69
OutBC8: R37.1 X7.8 | length 268.9
  Top Layer w11.81: X7.8@1496.06,951.18 1496.06,1195.87 1506.89,1206.69 R37.1@1515.75,1206.69
OutBC9: R38.1 X7.9 | length 267.3
  Top Layer w11.81: R38.1@1377.95,1206.69 1385.24,1206.69 1396.06,1195.87 X7.9@1396.06,951.18
OutBC10: R39.1 X7.10 | length 420.1
  Top Layer w11.81: R39.1@1240.16,1206.69 1240.16,1007.08 X7.10@1396.06,851.18
OutBC11: R40.1 X7.11 | length 577.2
  Top Layer w11.81: R40.1@1102.36,1206.69 1102.36,1044.88 X7.11@1396.06,751.18
OutBC12: R41.1 X7.12 | length 734.2
  Top Layer w11.81: R41.1@964.57,1206.69 964.57,1082.67 X7.12@1396.06,651.18
OutBC13: R42.1 X7.13 | length 891.3
  Top Layer w11.81: R42.1@826.77,1206.69 826.77,1120.47 X7.13@1396.06,551.18
OutBC14: R43.1 X7.14 | length 1048.4
  Top Layer w11.81: R43.1@688.98,1206.69 688.98,1158.27 X7.14@1396.06,451.18
OutBC15: R44.1 X7.15 | length 1241.9
  Top Layer w11.81: R44.1@551.18,1206.69 551.18,1133.82 1333.82,351.18 X7.15@1396.06,351.18
OutBC16: R45.1 X7.16 | length 1390.2
  Top Layer w11.81: R45.1@413.39,1206.69 413.39,1186.61 1348.82,251.18 X7.16@1396.06,251.18
OutC1: R14.1 X6.1 | length 1414.1
  Top Layer w7.87: R14.1@2755.91,4485.04 2755.91,4523.91 3690,5458 3723,5458 X6.1@3738,5473
OutC2: R15.1 X6.2 | length 1237.7
  Top Layer w7.87: R15.1@2893.7,4485.04 2893.7,4528.7 X6.2@3738,5373
OutC3: R16.1 X6.3 | length 1080.6
  Top Layer w7.87: R16.1@3031.5,4485.04 3031.5,4566.5 X6.3@3738,5273
OutC4: R17.1 X6.4 | length 923.5
  Top Layer w7.87: R17.1@3169.29,4485.04 3169.29,4604.29 X6.4@3738,5173
OutC5: R18.1 X6.5 | length 766.5
  Top Layer w7.87: R18.1@3307.09,4485.04 3307.09,4642.09 X6.5@3738,5073
OutC6: R19.1 X6.6 | length 609.4
  Top Layer w7.87: R19.1@3444.88,4485.04 3444.88,4679.88 X6.6@3738,4973
OutC7: R20.1 X6.7 | length 452.3
  Top Layer w7.87: R20.1@3582.68,4485.04 3582.68,4717.68 X6.7@3738,4873
OutC8: R21.1 X6.8 | length 298
  Top Layer w7.87: R21.1@3720.47,4485.04 3725.2,4485.04 3738,4497.83 X6.8@3738,4773
OutC9: R22.1 X6.9 | length 300.7
  Top Layer w7.87: X6.9@3838,4773 3838,4497.83 3850.8,4485.04 R22.1@3858.27,4485.04
OutC10: R23.1 X6.10 | length 453.4
  Top Layer w7.87: X6.10@3838,4873 3996.06,4714.94 R23.1@3996.06,4485.04
OutC11: R24.1 X6.11 | length 610.5
  Top Layer w7.87: X6.11@3838,4973 4133.86,4677.14 R24.1@4133.86,4485.04
OutC12: R25.1 X6.12 | length 767.6
  Top Layer w7.87: X6.12@3838,5073 4271.65,4639.35 R25.1@4271.65,4485.04
OutC13: R26.1 X6.13 | length 924.7
  Top Layer w7.87: X6.13@3838,5173 4409.45,4601.55 R26.1@4409.45,4485.04
OutC14: R27.1 X6.14 | length 1081.7
  Top Layer w7.87: X6.14@3838,5273 4547.24,4563.76 R27.1@4547.24,4485.04
OutC15: R28.1 X6.15 | length 1238.8
  Top Layer w7.87: X6.15@3838,5373 4685.04,4525.96 R28.1@4685.04,4485.04
OutC16: R29.1 X6.16 | length 1429.6
  Top Layer w7.87: X6.16@3838,5473 3844,5479 3881,5479 4822.84,4537.16 R29.1@4822.84,4485.04
VBUS: R4.2 U2.54 X2.1 | length 3401
  Top Layer w7.87: X2.1@310,2078.82 314.28,2074.54 R4.2@785,2074.54 787.54,2072 v1(837,2072) ; v1(2185,3009) 2375,3009 v1(2377,3007) ; v1(3008.26,2797.09) U2.54@3067.87,2797.09
  Bottom Layer w7.87: v1(837,2072) 1226,2072 1524,2370 1524,2649.79 1883.21,3009 v1(2185,3009) ; v1(2377,3007) 2548,3007 2561,2994 2719,2994 2835,2878 2883.99,2878 2884.62,2877.36 2903.38,2877.36 2904.01,2878 2910,2878 2942,2846 2959.35,2846 v1(3008.26,2797.09)
VCC: C2.2 C5.2 C6.2 C7.2 C8.2 C9.2 C10.2 C11.2 C12.2 C13.2 C17.2 C18.2 D4.C J1.1 LS1.P Q34.2 Q35.2 Q36.2 Q37.2 Q38.2 Q39.2 Q40.2 Q41.2 Q42.2 Q43.2 Q44.2 Q45.2 Q46.2 Q47.2 Q48.2 Q49.2 Q50.2 Q51.2 Q52.2 Q53.2 Q54.2 Q55.2 Q56.2 Q57.2 Q58.2 Q59.2 Q60.2 Q61.2 Q62.2 Q63.2 Q64.2 Q65.2 R9.1 S1.2 S2.2 S3.2 U1.23 U2.2 U2.16 U2.30 U2.37 U2.46 U2.55 U2.62 U2.86 U3.1 U3.15 U3.16 U5.24 U6.24 X1.2 | length 22321.2
  Top Layer w7.87: S2.2@289.5,3397.82 S2.2@293,3401.32 S2.2@290.5,3403.82 ; S3.2@293,3132.82 S3.2@296.5,3136.32 ; U3.1@2119.09,3315.03 2119.09,3326.64 2134.45,3342 2147.64,3342 ; U3.16@2147.64,3323.88 2147.64,3342 ; 2147.64,3342.58 2147.64,3348.82 2247.82,3449 2266.89,3468.07 ; U3.15@2167.32,3323.88 2166.34,3324.87 2166.34,3337.39 2161.73,3342 2147.64,3342 ; D4.C@2223.49,2323.39 D4.C@2225.84,2321.04 ; 2266.98,3467.98 2297.94,3498.94 2325.1,3498.94 2339.52,3484.52 C12.2@2351.14,3484.52 ; C11.2@2296.3,3438.66 C11.2@2301.34,3438.66 ; 2435.3,3131.3 v1(2456,3152) ; C7.2@2448.93,2900 2457.36,2891.57 U2.16@2552.13,2891.57 ; C10.2@2464,3111.46 2464.58,3112.05 U2.2@2552.13,3112.05 U2.2@2551.83,3112.35 ; v1(2630.75,2384.5) 2630.75,2570.74 C6.2@2643.07,2583.06 2643.07,2591.92 2684.02,2632.86 U2.30@2684.02,2680.94 ; v1(2705,3074) 2719.64,3059.36 2783.36,3059.36 2841.8,3117.8 2841.8,3196.39 U2.86@2841.5,3196.69 ; C8.2@2794.25,2597.21 C8.2@2797,2594.46 ; U2.37@2794.55,2681.25 U2.37@2794.25,2680.94 2794.25,2604.21 C8.2@2804,2594.46 ; U2.46@2935.98,2680.94 2935.98,2601.34 2968.46,2568.86 C5.2@2968.46,2564.43 ; U2.55@3067.87,2812.83 3069.06,2811.65 3145.35,2811.65 3152,2805 v1(3190,2805) ; U2.62@3067.87,2923.07 3133.08,2923.07 3135.28,2920.87 3178.2,2920.87 C9.2@3191,2908.07 ; v1(3661,1772.85) 3661,1773.6 3699.54,1812.14 C18.2@3699.54,1821 3686.74,1833.79 3686.74,1889.33 3680.07,1896 U6.24@3660.73,1896 U6.24@3661,1895.73 ; C2.2@4797.53,2050.82 C13.2@4797.54,2130.82 4797.54,2204.6 U1.23@4803.76,2210.82
  Top Layer w11.81: C9.2@3191,2908.07 3191.04,2908.04 3269.96,2908.04 v1(3270,2908)
  Top Layer w15.75: S3.2@293,3132.82 419.82,3006 1104.8,3006 ; S1.2@295,3678.82 294,3677.82 294,3138.82 S3.2@296.5,3136.32 ; v1(310,1597.22) 310,1538.34 331.34,1517 370.76,1517 ; Q65.2@375.98,1559.06 370.76,1553.83 370.76,1517 ; Q64.2@513.78,1559.06 519.69,1559.06 519.69,1517 ; Q63.2@651.58,1559.06 651.59,1517 ; Q62.2@789.37,1559.06 795.28,1553.15 795.28,1517 ; Q61.2@927.17,1559.06 933.07,1553.15 933.07,1517 ; v1(967,3437) 967,3373 1104.8,3235.2 1104.8,3006 ; Q60.2@1064.96,1559.06 1070.87,1553.15 1070.87,1517 ; v1(1137.91,2756.29) 1139.99,2758.37 1139.99,2970.81 ; Q59.2@1202.76,1559.06 1208.66,1553.15 1208.66,1517 ; Q58.2@1340.55,1559.06 1346.46,1553.15 1346.46,1517 ; Q57.2@1478.35,1559.06 1480.5,1556.9 1480.5,1517 ; U5.24@1583.15,3799 1586,3801.85 1589.03,3798.82 U5.24@1593.62,3798.82 1594.43,3798.82 1597.46,3801.85 C17.2@1597.46,3880 1602.11,3884.64 1635.77,3884.64 1645,3875.42 v3(1645,3839) ; Q56.2@1616.14,1559.06 1622.05,1553.15 1622.05,1517 ; Q55.2@1753.94,1559.06 1759.84,1553.15 1759.84,1517 ; v1(1821.15,2832.57) 1445.43,2832.57 X1.2@1392,2886 1314,2964 1146.8,2964 1139.99,2970.81 ; v1(1821.48,2650.14) 1823.34,2648.28 1823.34,2583.06 1911,2495.4 LS1.P@1911,2323.39 1912.17,2322.22 2222.32,2322.22 D4.C@2223.49,2323.39 ; Q54.2@1891.73,1559.06 1892.29,1558.5 1892.29,1517 ; Q53.2@2029.53,1559.06 2035.43,1553.15 2035.43,1517 ; v1(2065.75,2165) 2065.75,2105.65 R9.1@2066.93,2104.46 ; Q52.2@2167.32,1559.06 2173.23,1553.15 2173.23,1517 ; v1(2224,2404) 2226.14,2406.14 2252.01,2406.14 2252.87,2407 2255,2407 2256,2406 2514.62,2406 v1(2581.62,2339) ; C11.2@2296.3,3438.66 2266.98,3467.98 2266.89,3468.07 v1(2244.66,3490.3) 2357.14,3602.79 v1(2491.5,3602.79) ; Q51.2@2305.12,1559.06 2305.6,1558.57 2305.6,1517 ; v1(2314.96,3144) 2422.6,3144 2435.3,3131.3 ; C10.2@2438.87,3127.73 2455.14,3111.46 C10.2@2464,3111.46 ; Q50.2@2442.91,1559.06 2446.11,1555.86 2446.11,1517 ; C7.2@2448.93,2900 2448.93,2905.14 2457.79,2914 v1(2488,2914) ; v1(2630.75,2384.5) v1@2633.25,2387 ; v1(2722,2434) 2736.68,2434 2794.68,2492 2863,2492 ; v1(2767.47,3784) 2793.31,3809.84 Q34.2@2793.31,4122.84 2793.31,4130.71 2828.6,4166 2931.96,4166 ; C8.2@2804,2594.46 2856.54,2594.46 2863,2588 2863,2492 ; v1(2898,1736.18) 2807.18,1736.18 2588,1517 2446.11,1517 ; Q35.2@2931.1,4122.84 2931.96,4123.7 2931.96,4166 ; C5.2@2968.46,2564.43 C5.2@2968.46,2560 2968.46,2492.54 2969,2492 ; v1(3066,2497) 3061,2492 2969,2492 ; Q36.2@3068.9,4122.84 3071.04,4124.98 3071.04,4166 ; Q37.2@3206.69,4122.84 3210.82,4126.96 3210.82,4166 ; Q38.2@3344.49,4122.84 3345,4123.35 3345,4166 ; Q39.2@3482.28,4122.84 3480,4125.12 3480,4166 ; Q40.2@3620.08,4122.84 3621.96,4124.72 3621.96,4166 ; Q41.2@3757.87,4122.84 3758,4122.96 3758,4166 ; Q42.2@3895.67,4122.84 3897.52,4124.69 3897.52,4166 ; Q43.2@4033.46,4122.84 4032.65,4123.65 4032.65,4166 ; Q44.2@4171.26,4122.84 4176.77,4128.35 4176.77,4166 ; Q45.2@4309.05,4122.84 4310.42,4124.2 4310.42,4166 ; Q46.2@4446.85,4122.84 4449.43,4125.41 4449.43,4166 ; Q47.2@4584.64,4122.84 4582,4125.48 4582,4166 ; v1(4642.56,2050.82) C2.2@4797.53,2050.82 ; Q48.2@4722.44,4122.84 4724.41,4124.81 4724.41,4166 ; Q49.2@4860.24,4122.84 4860.24,4130.71 4824.95,4166 4724.41,4166 ; 370.76,1517 519.69,1517 ; 519.69,1517 651.59,1517 ; 651.59,1517 795.28,1517 ; 795.28,1517 933.07,1517 ; 933.07,1517 1070.87,1517 ; 1070.87,1517 1208.66,1517 ; 1104.8,3006 1139.99,2970.81 ; 1208.66,1517 1346.46,1517 ; 1346.46,1517 1480.5,1517 ; 1480.5,1517 1622.05,1517 ; 1622.05,1517 1759.84,1517 ; 1759.84,1517 1892.29,1517 ; 1892.29,1517 2035.43,1517 ; 2035.43,1517 2173.23,1517 ; 2173.23,1517 2305.6,1517 ; 2305.6,1517 2446.11,1517 ; 2863,2492 2969,2492 ; 2931.96,4166 3071.04,4166 ; 3071.04,4166 3210.82,4166 ; 3210.82,4166 3345,4166 ; 3345,4166 3480,4166 ; 3480,4166 3621.96,4166 ; 3621.96,4166 3758,4166 ; 3758,4166 3897.52,4166 ; 3897.52,4166 4032.65,4166 ; 4032.65,4166 4176.77,4166 ; 4176.77,4166 4310.42,4166 ; 4310.42,4166 4449.43,4166 ; 4449.43,4166 4582,4166 ; 4582,4166 4724.41,4166
  Bottom Layer w7.87: v1(2456,3152) 2460,3152 2477.64,3169.64 2507.38,3169.64 2525.01,3152 2527,3152 2560,3119 2660,3119 v1(2705,3074)
  Bottom Layer w15.75: v1(310,1597.22) 311.38,1597.22 1137.91,2423.74 v1(1137.91,2756.29) ; v1(967,3437) 1645,3437 ; v3(1645,3839) 1645,3437 ; v1(1821.48,2650.14) 1821.31,2650.31 1821.31,2832.4 v1(1821.15,2832.57) 1821.58,2833 2156.01,2833 2237.11,2914.11 ; v1(2065.75,2165) 1955.54,2275.2 1955.54,2278.85 LS1.P@1911,2323.39 1991.61,2404 v1(2224,2404) ; v1(2244.66,3490.3) 2191.35,3437 1645,3437 ; v1(2314.96,3144) 2276,3144 2237.11,3105.11 2237.11,2914.11 ; v1(2488,2914) 2486,2914 2485.89,2914.11 2237.11,2914.11 ; v1(2491.5,3602.79) 2586.25,3602.79 v1(2767.47,3784) ; v1(2581.62,2339) 2585,2339 2630.5,2384.5 v1(2630.75,2384.5) 2680.25,2434 v1(2722,2434) ; v1(2898,1736.18) 3017.48,1736.18 3054.15,1772.85 v1(3661,1772.85) 4364.59,1772.85 v1(4642.56,2050.82) ; v1(3066,2497) 3064,2499 3064,2653 3104,2693 3160.37,2693 3189,2721.63 3189,2804 v1(3190,2805) 3190,2828 v1(3270,2908)
pads on no net: U1.2 U1.3 U1.4 U1.13 U1.17 U1.19 U1.20 U2.1 U2.7 U2.8 U2.9 U2.14 U2.20 U2.21 U2.39 U2.40 U2.87 U2.88 U2.89 U2.90 U2.98 U2.100 X1.6

## Polygon pours and split planes (outlines as drawn)
GND on Top Layer "Top Layer-GND" (solid, remove dead copper, shelved, pour order 0): 297,4318.47 4910,4318.62 4910,1394 4910,1301.62 5162.84,1301.62 137.84,1301.62 137.84,4324.62 144.84,4331.62 153.84,4322.62 291.59,4318.62
GND on Bottom Layer "Bottom Layer-GND" (solid, remove dead copper, shelved, pour order 4): 303,4331.47 4894,4329.1 4894,1311.97 141.5,1311.97 141.5,4334.97 148.5,4341.97 157.5,4332.97 291.5,4332.97

## Silkscreen, mask and mechanical layers (free items; w line width, h text height)
Top Overlay:
  text "ETML-ES" at 2105.79,5533.02 h157.48
  text "2008_1_A" at 2106.77,5279.09 h118.11
Board Outline (ES):
  lines w10: 0,0 0,5905.51 5236.22,5905.51 5236.22,0 0,0

## Text inside footprints (layer, text, board x,y; h text height)
LS1: Top Overlay "+" at 2068.48,2265.52 h50 r180; Top Overlay "-" at 2066.93,2727.58 h50 r180; Components Bodies "+" at 2068.48,2265.52 h50 r180; Components Bodies "-" at 2068.48,2708.83 h50 r180